# Altium PCB DAQ_REV_B.PcbDoc (part 1 of 2)
Units mil, origin at the board's own origin, x right, y up, seen from the top; angles counter-clockwise.
Board outline 2228.79 x 3254.41 mil, 2 copper layers (Top Layer, Bottom Layer), stack 63.824 mil thick; 159 components, 100 nets, 487 pads, 285 vias.
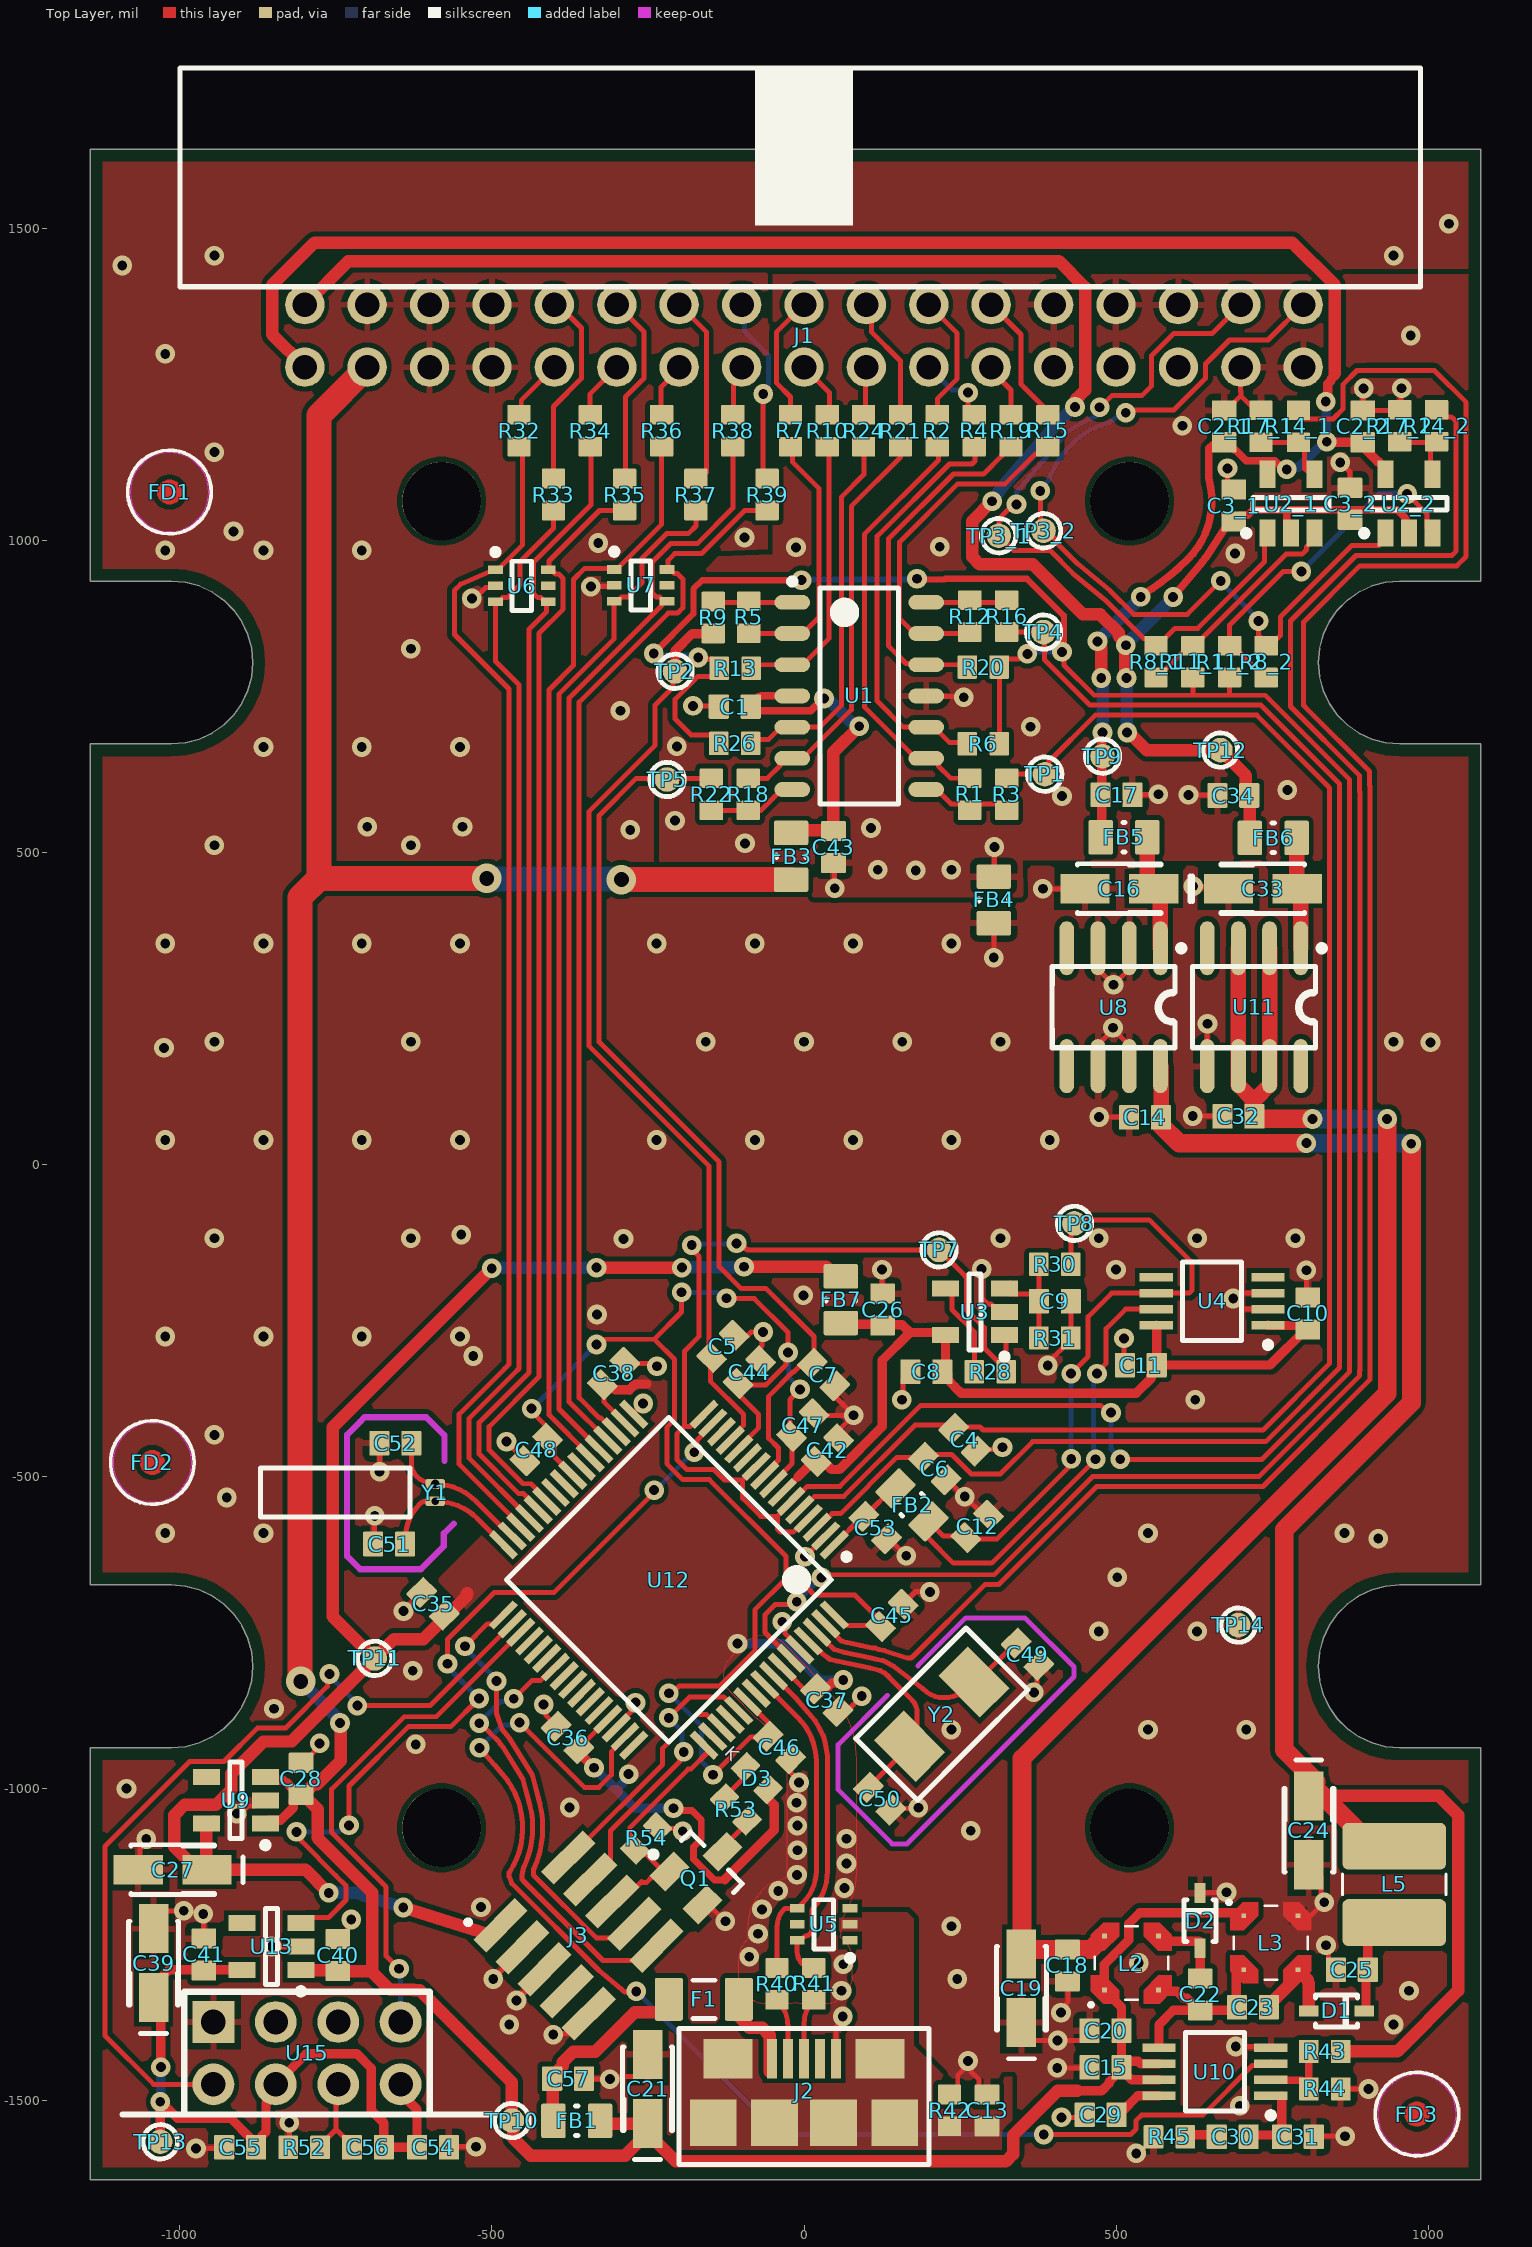
[diagram p0: Top Layer view]
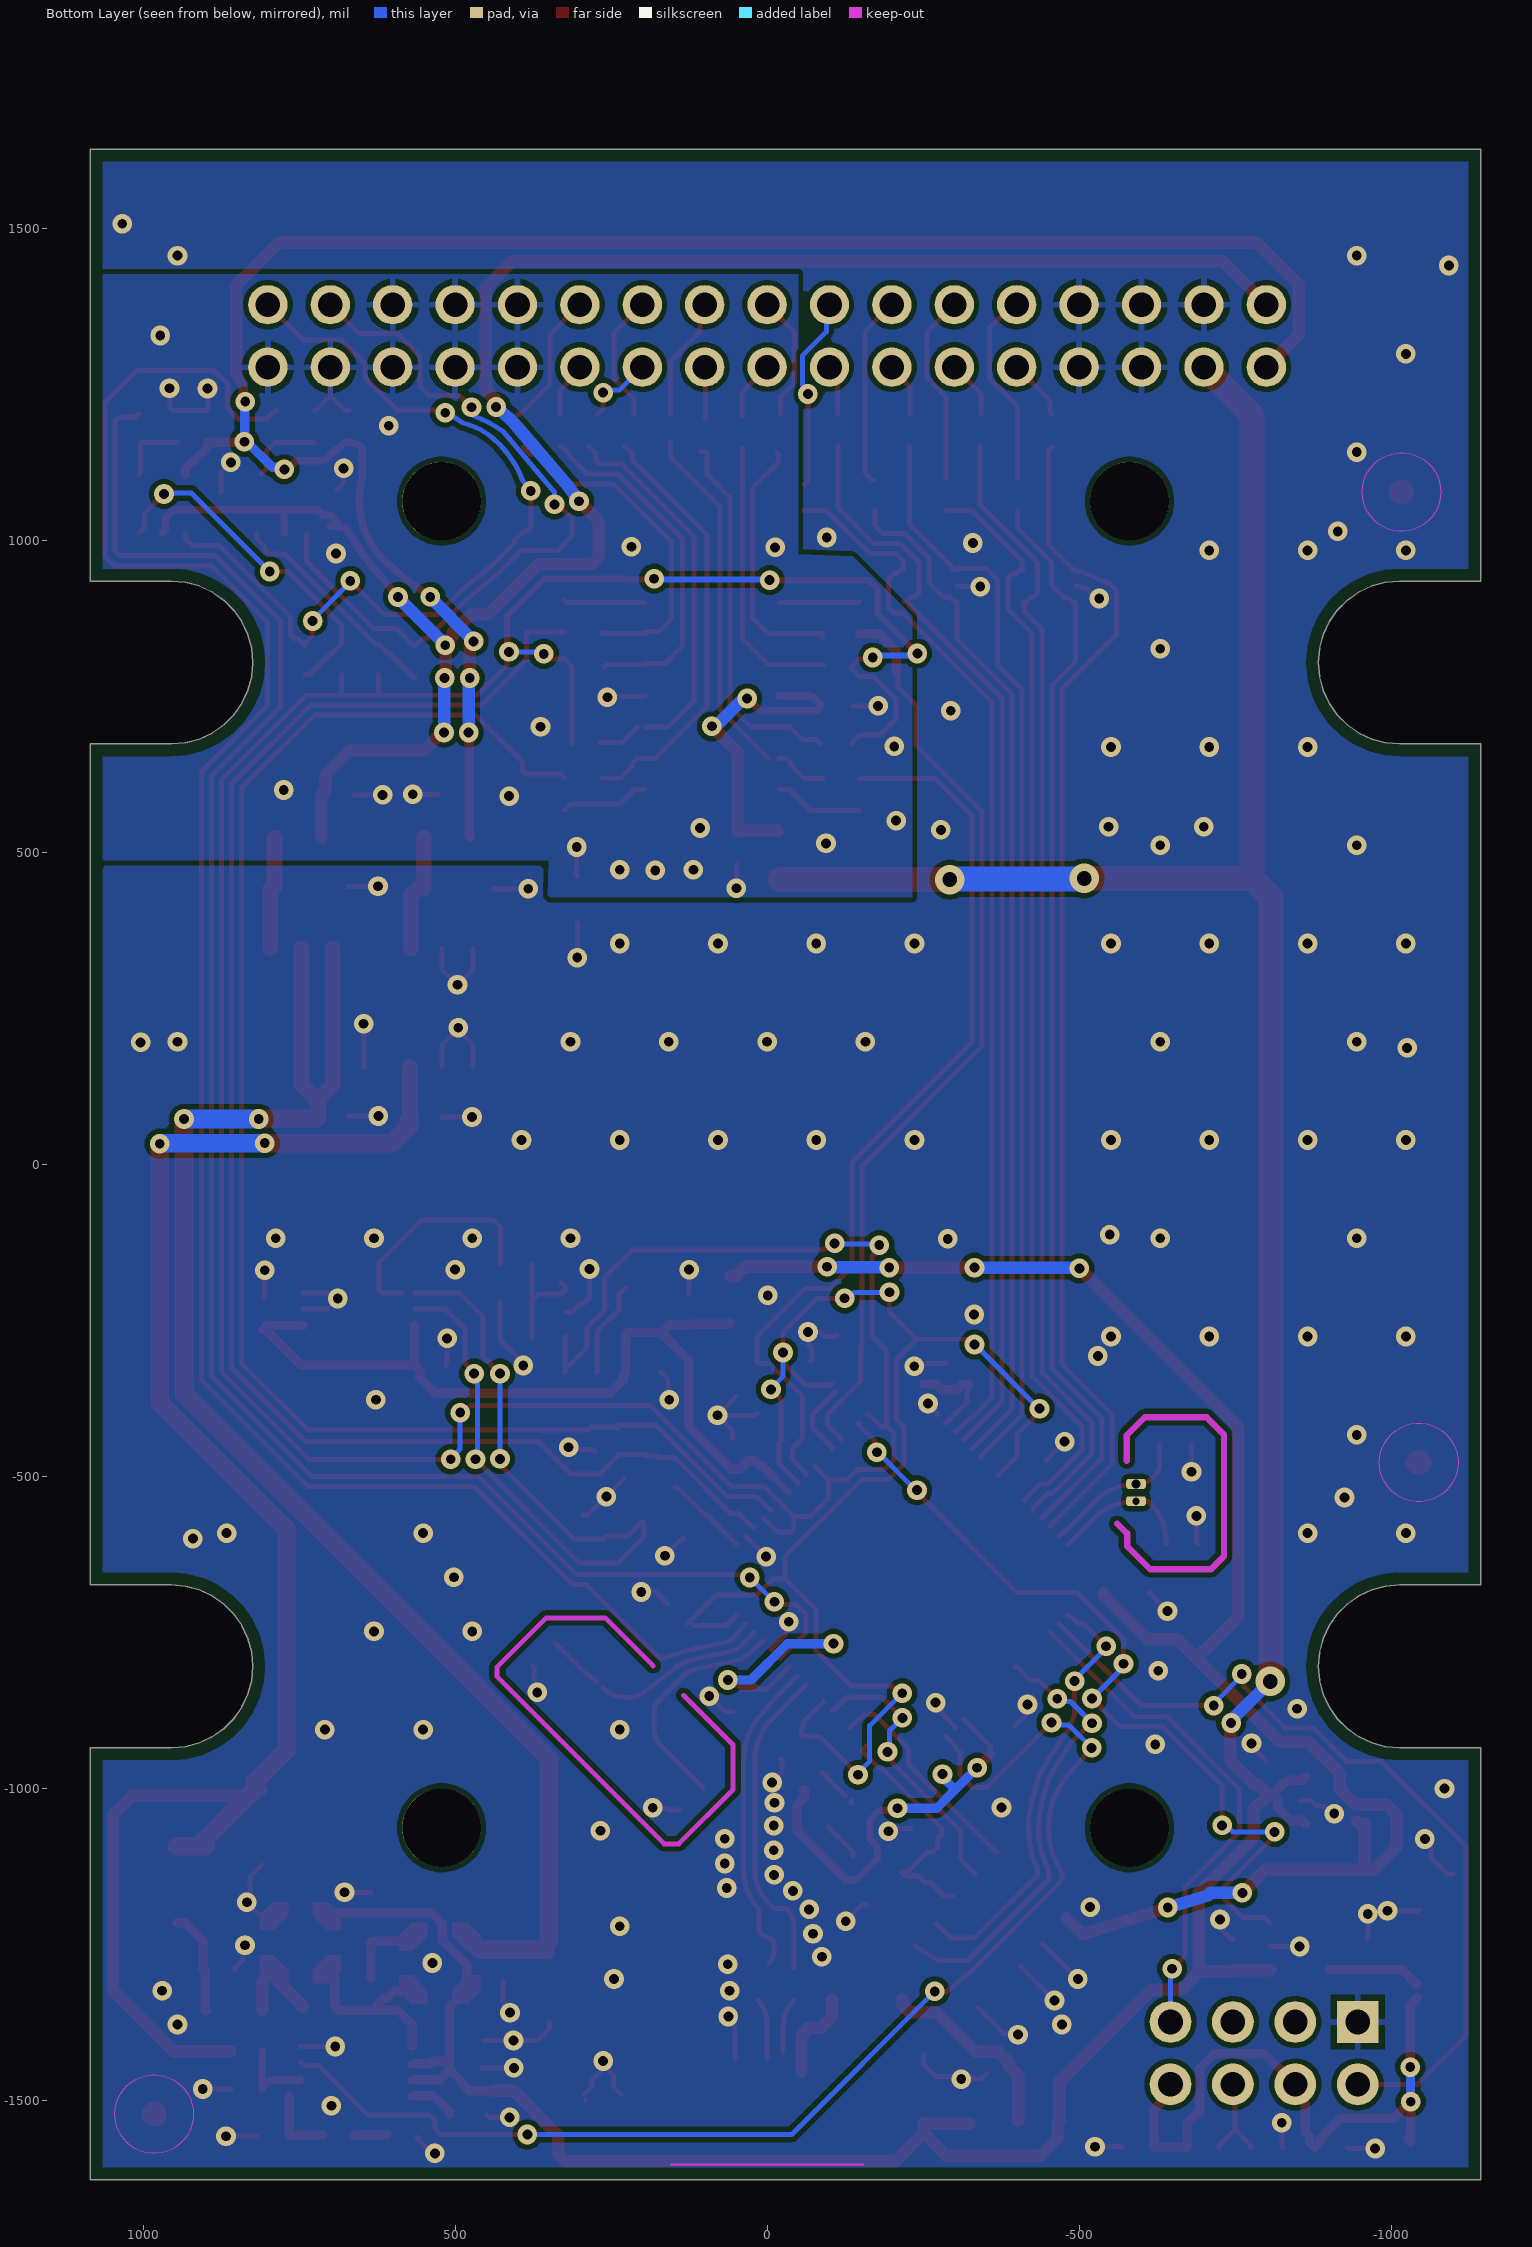
[diagram p1: Bottom Layer view, seen from below]

## Layer stack, top to bottom
Top Solder: solder mask 0.4, Solder Resist, Dk 3.5
Top Layer: signal copper 1.4
Dielectric 1: dielectric 61.0236, FR-4, Dk 4.8
Bottom Layer: signal copper 1.4
Bottom Solder: solder mask 0.4, Solder Resist, Dk 3.5

## Board outline
1084.83,1627.44 -1143.96,1627.44 -1143.96,935.16 -1013.82,935.16 -991.15,933.18 -969.17,927.29 -948.54,917.67 -929.9,904.62 -913.81,888.52 -900.76,869.88 -891.14,849.26 -885.25,827.28 -883.26,804.61 -885.25,781.93 -891.14,759.95 -900.76,739.33 -913.81,720.69 -929.9,704.59 -948.54,691.54 -969.17,681.92 -991.15,676.03 -1013.82,674.05 -1143.96,674.05 -1143.96,-673.58 -1013.82,-673.58 -991.15,-675.56 -969.17,-681.45 -948.54,-691.07 -929.9,-704.12 -913.81,-720.21 -900.76,-738.86 -891.14,-759.48 -885.25,-781.46 -883.26,-804.13 -885.25,-826.8 -891.14,-848.79 -900.76,-869.41 -913.81,-888.05 -929.9,-904.14 -948.54,-917.2 -969.17,-926.81 -991.15,-932.7 -1013.82,-934.69 -1143.96,-934.69 -1143.96,-1626.97 1084.83,-1626.97 1084.83,-934.69 954.68,-934.69 932.01,-932.7 910.03,-926.81 889.41,-917.2 870.77,-904.14 854.67,-888.05 841.62,-869.41 832,-848.79 826.11,-826.8 824.13,-804.13 826.11,-781.46 832,-759.48 841.62,-738.86 854.67,-720.21 870.77,-704.12 889.41,-691.07 910.03,-681.45 932.01,-675.56 954.68,-673.58 1084.83,-673.58 1084.83,674.05 954.68,674.05 932.01,676.03 910.03,681.92 889.41,691.54 870.77,704.59 854.67,720.69 841.62,739.33 832,759.95 826.11,781.93 824.13,804.61 826.11,827.28 832,849.26 841.62,869.88 854.67,888.52 870.77,904.62 889.41,917.67 910.03,927.29 932.01,933.18 954.68,935.16 1084.83,935.16

## Design rules (kind name [scope] priority, off if disabled: settings)
BoardOutlineClearance [All] p1: gap=19.68 ignorepadtopadclearanceinfootprint=FALSE
Clearance [All] p1: gap=8 ignorepadtopadclearanceinfootprint=TRUE
DiffPairsRouting [All] p1: maxlimit=10 minlimit=10 mostfreqgap=10 toplayer_minwidth=8 toplayer_maxwidth=15 toplayer_prefwidth=8 bottomlayer_minwidth=8 bottomlayer_maxwidth=15 bottomlayer_prefwidth=8 maxuncoupledlength=500
FanoutControl Fanout_Default [All] p1: bgadir=Out bgaviamode=Centered fanoutstyle=Auto fanoutdirection=Alternating viagrid=1 // Fanout_Default (Default Rule)
FanoutControl Fanout_Small [(CompPinCount < 5)] p2: bgadir=Out bgaviamode=Centered fanoutstyle=Auto fanoutdirection=OutThenIn viagrid=1 // Fanout_Small (Default Rule)
FanoutControl Fanout_LCC [IsLCC] p4: bgadir=Out bgaviamode=Centered fanoutstyle=Auto fanoutdirection=Alternating viagrid=1 // Fanout_LCC (Default Rule)
FanoutControl Fanout_BGA [IsBGA] p5: bgadir=Out bgaviamode=Centered fanoutstyle=Auto fanoutdirection=Alternating viagrid=1 // Fanout_BGA (Default Rule)
PolygonConnect PolygonConnect_1 [InNet('SHLD') vs InNet('SHLD')] p1: connectstyle=Direct reliefconductorwidth=10 reliefentries=4 polygonreliefangle="90 Angle" airgapwidth=10
PolygonConnect [All] p2: thpad.connectstyle=Relief thpad.reliefconductorwidth=10 thpad.reliefentries=4 thpad.polygonreliefangle="90 Angle" thpad.airgapwidth=10 smdpad.connectstyle=Relief smdpad.reliefconductorwidth=10 smdpad.reliefentries=4 smdpad.polygonreliefangle="90 Angle" smdpad.airgapwidth=10 via.connectstyle=Direct via.reliefconductorwidth=10 via.reliefentries=4 via.polygonreliefangle="90 Angle" via.airgapwidth=10
RoutingVias [All] p1: holewidth=15.75 width=31.5 viastyle="Through Hole" minholewidth=11.81 minwidth=27.56 maxholewidth=31.5 maxwidth=47.24
SolderMaskExpansion [All] p1: expansion=4 istentingtop=FALSE
Width [All] p1: maxlimit=100 minlimit=8 preferedwidth=10
25 further rules are at their usual default settings.

## Classes and differential pairs
channel class Output_amplifier: U_OUT_AMP1 U_OUT_AMP2
net class PIO[0..7]: PIO0 PIO1 PIO2 PIO3 PIO4 PIO5 PIO6 PIO7
net class ANALOG: OUT1_P OUT2_P OUT3_P OUT4_P VREF/2
component class U_VREF: C8 C9 C10 C11 C12 R28 R30 R31 TP7 TP8 U3 U4
component class U_USB: C13 C21 C57 F1 FB1 J2 R40 R41 R42 TP10 U5
component class U_uC: C35 C36 C37 C38 C42 C43 C44 C45 C46 C47 C48 C49 C50 C51 C52 C53 FB2 FB3 FB4 J3 U12 Y1 Y2
component class U_PS: C15 C18 C19 C20 C22 C23 C24 C25 C26 C27 C28 C29 C30 C31 C39 C40 C41 D1 D2 FB7 L2 L3 R43 R44 R45 TP11 TP13 U9 U10 U13
component class U_OUT_AMP2: C2_2 C3_2 R8_2 R11_2 R14_2 R17_2 TP3_2 U2_2
component class U_OUT_AMP1: C2_1 C3_1 R8_1 R11_1 R14_1 R17_1 TP3_1 U2_1
component class U_INTFC: C54 C55 C56 D3 Q1 R52 R53 R54 U15
component class U_IN_AMP: C1 C4 C5 C6 C7 R1 R2 R3 R4 R5 R6 R7 R9 R10 R12 R13 R15 R16 R18 R19 R20 R21 R22 R24 R26 TP1 TP2 TP4 TP5 U1
component class U_DAQ_IO: J1 R32 R33 R34 R35 R36 R37 R38 R39 U6 U7
component class DAQ_REV_B: FD1 FD2 FD3
differential pair USB: +USB_P -USB_N
differential pair IN4: +IN4_P -IN4_N
differential pair IN3: +IN3_P -IN3_N
differential pair IN2: +IN2_P -IN2_N
differential pair IN1: +IN1_P -IN1_N

## Components (designator, comment, footprint, x,y, rotation, side; value= is the part's Value field where it differs from the comment)
C1 "comment" C_0603 -111.01,734.04 r0 top
C2_1 "100n" C_0603 673.23,1183.07 r90 top (schematic designator C2)
C2_2 "100n" C_0603 895.67,1183.07 r90 top (schematic designator C2)
C3_1 "100n" C_0603 688.98,1056.1 r90 top (schematic designator C3)
C3_2 "100n" C_0603 875,1059.06 r90 top (schematic designator C3)
C4 "comment" C_0603 257.87,-440.94 r315 top
C5 "comment" C_0603 -129.92,-291.34 r45 top
C6 "comment" C_0603 209.65,-487.2 r315 top
C7 "comment" C_0603 31.5,-336.61 r315 top
C8 "comment" C_0603 196.11,-332.02 r0 top
C9 "comment" C_0603 402,-218.88 r0 top
C10 "comment" C_0603 807.51,-238.57 r90 top
C11 "comment" C_0603 539.79,-321.25 r180 top
C12 "comment" C_0603 277.56,-579.72 r45 top
C13 "comment" C_0603 293.31,-1515.75 r270 top
C14 "comment" C_0603 546.26,75.71 r180 top
C15 "comment" C_0603 483.27,-1446.85 r0 top
C16 "comment" "Tantalum Case A" 505.39,442.17 r180 top
C17 "comment" C_0603 500.98,592.44 r180 top
C18 "comment" C_0603 422.24,-1283.39 r270 top
C19 "comment" "Tantalum Case A" 348.43,-1319.88 r90 top
C20 "comment" C_0603 483.27,-1387.8 r180 top
C21 "comment" "Tantalum Case A" -250.63,-1481.28 r90 top
C22 "comment" C_0603 634.84,-1329.72 r90 top
C23 "comment" C_0603 719.49,-1350.39 r0 top
C24 "comment" "Tantalum Case A" 809.06,-1066.93 r270 top
C25 "comment" C_0603 877.95,-1290.35 r180 top
C26 "comment" C_0603 125.98,-232.28 r90 top
C27 "comment" "Tantalum Case A" -1011.81,-1129.92 r180 top
C28 "comment" C_0603 -806.1,-984.25 r90 top
C29 "comment" C_0603 475.39,-1522.64 r180 top
C30 "comment" C_0603 687.01,-1558.07 r180 top
C31 "comment" C_0603 791.34,-1558.07 r0 top
C32 "comment" C_0603 696.24,77.31 r180 top
C33 "comment" "Tantalum Case A" 735.39,442.17 r0 top
C34 "comment" C_0603 687.99,591.46 r0 top
C35 "comment" C_0603 -594.49,-703.74 r135 top
C36 "comment" C_0603 -378.94,-918.31 r135 top
C37 "comment" C_0603 36.42,-858.27 r315 top
C38 "comment" C_0603 -305.12,-334.65 r45 top
C39 "comment" "Tantalum Case A" -1042.32,-1279.53 r90 top
C40 "comment" C_0603 -747.05,-1266.73 r90 top
C41 "comment" C_0603 -961.61,-1265.75 r90 top
C42 "comment" C_0603 37.4,-457.68 r45 top
C43 "comment" C_0603 47.24,508.86 r270 top
C44 "comment" C_0603 -87.6,-332.68 r45 top
C45 "comment" C_0603 140.75,-722.44 r45 top
C46 "comment" C_0603 -39.37,-934.06 r315 top
C47 "comment" C_0603 -1.97,-417.32 r45 top
C48 "comment" C_0603 -429.13,-456.69 r225 top
C49 "comment" C_0603 358.15,-784.77 r315 top
C50 "comment" C_0603 121.12,-1016.24 r315 top
C51 "comment" C_0603 -664.88,-608.01 r180 top
C52 "comment" C_0603 -654.81,-446.55 r180 top
C53 "comment" C_0603 114.17,-581.69 r315 top
C54 "100n" C_0603 -594.49,-1574.8 r180 top
C55 "2u2" C_0603 -903.54,-1574.8 r0 top
C56 "1u" C_0603 -698.82,-1574.8 r0 top
C57 "comment" C_0603 -377.95,-1464.65 r0 top
D1 "PMEG2020" SOD323 853.35,-1356.3 r0 top
D2 "PMEG2020" SOD323 634.84,-1211.61 r90 top
D3 "LED Green" LED_0603 -75.79,-983.27 r315 top
F1 "250mA" "PPTCF 1206" -160.43,-1337.6 r180 top
FB1 "120Ω @ 100MHz" SMD_0805 -364.17,-1532.48 r0 top
FB2 "120Ω @ 100MHz" SMD_0805 173.23,-545.28 r315 top
FB3 "120Ω @ 100MHz" SMD_0805 -20.67,494.1 r90 top
FB4 "120Ω @ 100MHz" SMD_0805 304.13,424.21 r90 top
FB5 "120Ω @ 100MHz" SMD_0805 512.8,524.53 r180 top
FB6 "120Ω @ 100MHz" SMD_0805 751.97,523.54 r180 top
FB7 "120Ω @ 100MHz" SMD_0805 59.06,-216.54 r270 top
FD1 "Fiducial 1mm" FID1 -1016.73,1077.76 r180 top
FD2 "Fiducial 1mm" FID1 -1044.29,-477.36 r0 top
FD3 "Fiducial 1mm" FID1 982.28,-1521.65 r0 top
J1 "2X17" IDC34R 0,1327.95 r0 top locked
J2 "micro USB B" MICRO_USB_A 0,-1484.25 r0 top
J3 "M50-3600542" HEADER_2X05_1.27mm -361.45,-1235.31 r315 top
L2 "LPD3015-153" LPD3015 524.61,-1279.53 r90 top
L3 "LPD3015-153" LPD3015 748.03,-1247.05 r0 top
L5 "10u" IND_SMD_4X4mm 945.87,-1153.54 r90 top
Q1 "2N7002" SOT23-3 -160.03,-1130.25 r315 top
R1 "comment" R_0603 265.68,593.54 r270 top
R2 "comment" R_0603 213.58,1176.18 r270 top
R3 "comment" R_0603 324.74,593.54 r90 top
R4 "comment" R_0603 272.64,1176.18 r270 top
R5 "comment" R_0603 -88.65,877.01 r90 top
R6 "comment" R_0603 287.34,674.25 r180 top
R7 "comment" R_0603 -21.65,1176.18 r270 top
R8_1 "comment" R_0603 563.98,806.1 r90 top (schematic designator R8)
R8_2 "comment" R_0603 740.65,806.1 r90 top (schematic designator R8)
R9 "comment" R_0603 -145.46,876.75 r270 top
R10 "comment" R_0603 37.4,1176.18 r270 top
R11_1 "comment" R_0603 623.03,806.1 r90 top (schematic designator R11)
R11_2 "comment" R_0603 682.09,806.1 r90 top (schematic designator R11)
R12 "comment" R_0603 265.68,878.97 r90 top
R13 "comment" R_0603 -110.3,795.31 r0 top
R14_1 "comment" R_0603 792.32,1183.07 r270 top (schematic designator R14)
R14_2 "comment" R_0603 1013.78,1184.06 r270 top (schematic designator R14)
R15 "comment" R_0603 390.75,1176.18 r270 top
R16 "comment" R_0603 324.74,878.97 r270 top
R17_1 "comment" R_0603 732.28,1183.07 r270 top (schematic designator R17)
R17_2 "comment" R_0603 954.72,1184.06 r270 top (schematic designator R17)
R18 "comment" R_0603 -89.36,593.29 r270 top
R19 "comment" R_0603 331.69,1176.18 r270 top
R20 "comment" R_0603 287.34,797.28 r180 top
R21 "comment" R_0603 154.53,1176.18 r270 top
R22 "comment" R_0603 -148.42,593.29 r90 top
R24 "comment" R_0603 95.47,1176.18 r270 top
R26 "comment" R_0603 -111.01,674.98 r0 top
R28 "comment" R_0603 298.48,-332.02 r0 top
R30 "comment" R_0603 402,-159.83 r0 top
R31 "comment" R_0603 402,-277.94 r180 top
R32 "comment" R_0603 -456.69,1176.18 r90 top
R33 "comment" R_0603 -401.51,1073.82 r270 top
R34 "comment" R_0603 -342.44,1176.18 r90 top
R35 "comment" R_0603 -287.36,1073.82 r270 top
R36 "comment" R_0603 -228.19,1176.18 r90 top
R37 "comment" R_0603 -173.21,1073.82 r270 top
R38 "comment" R_0603 -113.94,1176.18 r90 top
R39 "comment" R_0603 -59.06,1073.82 r270 top
R40 "comment" R_0603 -43.31,-1312.99 r90 top
R41 "comment" R_0603 15.75,-1312.99 r90 top
R42 "comment" R_0603 233.27,-1515.75 r270 top
R43 "comment" R_0603 834.65,-1421.26 r180 top
R44 "comment" R_0603 834.65,-1481.3 r180 top
R45 "comment" R_0603 585.63,-1558.07 r0 top
R52 "comment" R_0603 -801.18,-1574.8 r0 top
R53 "comment" R_0603 -109.25,-1033.46 r135 top
R54 "comment" R_0603 -252.95,-1079.72 r225 top
TP1 "testpoint" TP1_FULL 385.76,625.69 r0 top
TP2 "testpoint" TP1_FULL -206.76,790.39 r90 top
TP3_1 "testpoint" TP1_FULL 312.01,1007.87 r90 top (schematic designator TP3)
TP3_2 "testpoint" TP1_FULL 383.86,1015.75 r180 top (schematic designator TP3)
TP4 "testpoint" TP1_FULL 383.79,853.38 r90 top
TP5 "testpoint" TP1_FULL -219.49,617.13 r90 top
TP7 "testpoint" TP1_FULL 216.36,-136.74 r90 top
TP8 "testpoint" TP1_FULL 433.28,-94.28 r90 top
TP9 "testpoint" TP1_FULL 478.35,654.45 r0 top
TP10 "testpoint" TP1_FULL -468.07,-1531.93 r90 top
TP11 "testpoint" TP1_FULL -687.93,-791.41 r270 top
TP12 "testpoint" TP1_FULL 667.32,664.29 r0 top
TP13 "testpoint" TP1_FULL -1031.5,-1565.95 r270 top
TP14 "testpoint" TP1_FULL 696.02,-737.97 r90 top
U1 "OPA4348" SOIC14 88.52,751.02 r0 top
U2_1 "ADA4000-1" SOT23-5 780.51,1059.06 r90 top (schematic designator U2)
U2_2 "ADA4000-1" SOT23-5 969.49,1059.06 r90 top (schematic designator U2)
U3 "TLV2471" SOT23-5 274.01,-235.96 r180 top
U4 "ADR3525WA" MSOP8 653.97,-218.88 r180 top
U5 "PUSB2X4Y" SOT363 31.5,-1217.52 r180 top
U6 "PUSB2X4Y" SOT363 -452.18,927.51 r0 top
U7 "PUSB2X4Y" SOT363 -261.81,928.15 r0 top
U8 "MC78L12ACDG" SOIC8 496.14,252.21 r270 top
U9 "TPS70933" SOT23-5 -910.43,-1018.7 r180 top
U10 "ADP1613" MSOP8 658.46,-1453.74 r180 top
U11 "MC79L12ACDG" SOIC8 721.14,252.21 r270 top
U12 "ATSAM3S4B" LQFP64 -216.54,-665.35 r225 top
U13 "TPS73633" SOT23-5 -853.35,-1252.95 r180 top
U15 "ESP-01" ESP-01 -796.46,-1424.02 r90 top locked
Y1 "32.768khz" 2X6_FLAT -591.18,-525.59 r180 top
Y2 "16MHz" 5X3.2 220.74,-880.62 r225 top

## Footprints (in the part's own frame and the unit in brackets; to place one, negate y for a bottom-side part, rotate by r counter-clockwise, add the part's x,y. Pads: shape width x height; smd on the part's side, far side on the other; paste and mask are expansions set on the pad)
2X6_FLAT [mm]
  rrect50% 0.8x0.4 hole 0.35: 1(0,-0.35)
  rrect50% 0.8x0.4 hole 0.3: 2(0,0.35)
  silkscreen extent 1.02,-1 7.11,1, body extent -0.14,-1 7,1, height 3
5X3.2 [mm] "TXC 7A series crysal oscillator footprint"
  rect 1.7x2.4 smd: 1(-1.85,0) 2(1.85,0)
  silkscreen extent -3.18,-1.78 3.18,1.78, body extent -2.5,-1.6 2.5,1.6, height 1.26
C_0603 [mm] "Chip Capacitor, 2-Leads, Body 1.57x0.85mm, IPC Medium Density"
  rrect10% 0.82x1 smd: 1(-0.65,0) 2(0.65,0)
  body extent -0.82,-0.48 0.82,0.48, height 0.95
ESP-01 [mm]
  rect 1.7x1.7 hole 1: 1(1.27,3.81)
  round 1.7 hole 1: 2(-1.27,3.81) 3(1.27,1.27) 4(-1.27,1.27) 5(1.27,-1.27) 6(-1.27,-1.27) 7(1.27,-3.81) 8(-1.27,-3.81)
  silkscreen extent -2.5,-7.5 2.5,7.5, body extent -2.8,-7.25 22,7.25, height 13.88
FID1 [mil]
  Top Layer region: 0,-19.68 -3.92,-19.68 -11.15,-16.69 -16.69,-11.15 -19.68,-3.92 -19.68,0 -19.68,3.92 -16.69,11.15 -11.15,16.69 -3.92,19.68 0,19.69 3.92,19.69 11.15,16.69 16.69,11.15 19.68,3.92 19.68,0 19.68,-3.92 16.69,-11.15 11.15,-16.69 3.92,-19.68 0,-19.68
  Keep-Out Layer circle w0.39: c0,0 r62.99
  silkscreen extent -67,-67 67,67
HEADER_2X05_1.27mm [mm]
  rect 0.74x2.4 smd: 1(-2.54,-1.95) 2(-2.54,1.95) 3(-1.27,-1.95) 4(-1.27,1.95) 5(0,-1.95) 6(0,1.95) 7(1.27,-1.95) 8(1.27,1.95) 9(2.54,-1.95) 10(2.54,1.95)
  silkscreen extent -3.66,-2.89 -3.46,-2.69, body extent -3.18,-2.75 3.17,2.75, height 4.51
IDC34R [mm]
  round 1.6 hole 1: 1(-20.32,-1.27) 2(-20.32,1.27) 3(-17.78,-1.27) 4(-17.78,1.27) 5(-15.24,-1.27) 6(-15.24,1.27) 7(-12.7,-1.27) 8(-12.7,1.27) 9(-10.16,-1.27) 10(-10.16,1.27) 11(-7.62,-1.27) 12(-7.62,1.27) 13(-5.08,-1.27) 14(-5.08,1.27) 15(-2.54,-1.27) 16(-2.54,1.27) 17(0,-1.27) 18(0,1.27) 19(2.54,-1.27) 20(2.54,1.27) 21(5.08,-1.27) 22(5.08,1.27) 23(7.62,-1.27) 24(7.62,1.27) 25(10.16,-1.27) 26(10.16,1.27) 27(12.7,-1.27) 28(12.7,1.27) 29(15.24,-1.27) 30(15.24,1.27) 31(17.78,-1.27) 32(17.78,1.27) 33(20.32,-1.27) 34(20.32,1.27)
  silkscreen extent -25.4,2 25.1,10.9, body extent -25.71,-1.56 25.71,12, height 8.85
IND_SMD_4X4mm [mm]
  rrect26% 1.91x4.22 smd: 1(-1.555,0) 2(1.555,0)
  silkscreen extent -0.42,-2.1 0.42,2.1, body extent -2,-2 2,2, height 2.15
LED_0603 [mm] "SMD LED, 2-Leads, Body 1.57x0.85mm, IPC Medium Density"
  rrect10% 0.8x0.95 smd: 1(-0.65,0) 2(0.65,0)
  body extent -0.8,-0.4 0.8,0.4, height 0.7
LPD3015 [mm]
  rect 0.2x0.2 smd: 1(-1.1,1.1) 2(-1.1,-1.1) 3(1.1,-1.1) 4(1.1,1.1)
  Top Layer region: -1.65,0.5 -1.1,0.5 -0.5,1.1 -0.5,1.65 -1.15,1.65 -1.65,1.15
  Top Layer region: -1.65,-0.5 -1.1,-0.5 -0.5,-1.1 -0.5,-1.65 -1.15,-1.65 -1.65,-1.15
  Top Layer region: 1.65,-0.5 1.1,-0.5 0.5,-1.1 0.5,-1.65 1.15,-1.65 1.65,-1.15
  Top Layer region: 1.65,0.5 1.1,0.5 0.5,1.1 0.5,1.65 1.15,1.65 1.65,1.15
  silkscreen extent -1.75,-1.5 1.5,1.69, body extent -1.55,-1.54 1.53,1.54, height 1.5
LQFP64 [mm]
  rect 1.4x0.3 smd: 1(-5.775,3.75) 2(-5.775,3.25) 3(-5.775,2.75) 4(-5.775,2.25) 5(-5.775,1.75) 6(-5.775,1.25) 7(-5.775,0.75) 8(-5.775,0.25) 9(-5.775,-0.25) 10(-5.775,-0.75) 11(-5.775,-1.25) 12(-5.775,-1.75) 13(-5.775,-2.25) 14(-5.775,-2.75) 15(-5.775,-3.25) 16(-5.775,-3.75) 33(5.775,-3.75) 34(5.775,-3.25) 35(5.775,-2.75) 36(5.775,-2.25) 37(5.775,-1.75) 38(5.775,-1.25) 39(5.775,-0.75) 40(5.775,-0.25) 41(5.775,0.25) 42(5.775,0.75) 43(5.775,1.25) 44(5.775,1.75) 45(5.775,2.25) 46(5.775,2.75) 47(5.775,3.25) 48(5.775,3.75)
  rect 0.3x1.4 smd: 17(-3.75,-5.775) 18(-3.25,-5.775) 19(-2.75,-5.775) 20(-2.25,-5.775) 21(-1.75,-5.775) 22(-1.25,-5.775) 23(-0.75,-5.775) 24(-0.25,-5.775) 25(0.25,-5.775) 26(0.75,-5.775) 27(1.25,-5.775) 28(1.75,-5.775) 29(2.25,-5.775) 30(2.75,-5.775) 31(3.25,-5.775) 32(3.75,-5.775) 49(3.75,5.775) 50(3.25,5.775) 51(2.75,5.775) 52(2.25,5.775) 53(1.75,5.775) 54(1.25,5.775) 55(0.75,5.775) 56(0.25,5.775) 57(-0.25,5.775) 58(-0.75,5.775) 59(-1.25,5.775) 60(-1.75,5.775) 61(-2.25,5.775) 62(-2.75,5.775) 63(-3.25,5.775) 64(-3.75,5.775)
  silkscreen extent -5.9,-4.68 4.68,4.67, body extent -6,-6 6,6, height 1.6
MICRO_USB_A [mm]
  rect 0.4x1.6 smd: 1(-1.3,1.3) 2(-0.65,1.3) 3(0,1.3) 4(0.65,1.3) 5(1.3,1.3)
  rect 2x1.6 smd: 6(-3.1,1.3) 6(3.1,1.3)
  rect 1.9x1.9 smd: 7(-3.7,-1.3) 7(-1.2,-1.3) 7(1.2,-1.3) 7(3.7,-1.3)
  Keep-Out Layer lines w0.1: -3.9,-3 3.9,-3
  silkscreen extent -5.08,-3 5.08,2.54, body extent -3.96,-4.06 3.96,1.6, height 2.71
MSOP8 [mm]
  rect 1.35x0.35 smd: 1(-2.275,0.975) 2(-2.275,0.325) 3(-2.275,-0.325) 4(-2.275,-0.975) 5(2.275,-0.975) 6(2.275,-0.325) 7(2.275,0.325) 8(2.275,0.975)
  silkscreen extent -2.4,-1.6 1.2,1.9, body extent -2.58,-1.6 2.58,1.6, height 1.01
"PPTCF 1206" [mm] "PPTC fuse 2-Leads, Body 3.15x1.60mm, IPC Medium Density"
  rrect15% 1.15x1.75 smd: 1(-1.425,0) 2(1.425,0)
  silkscreen extent -0.45,-0.77 0.45,0.78, body extent -1.6,-0.82 1.6,0.83, height 0.59
R_0603 [mm] "Chip Resistor, 2-Leads, Body 1.57x0.85mm, IPC Medium Density"
  rrect10% 0.8x0.95 smd: 1(-0.65,0) 2(0.65,0)
  body extent -0.82,-0.48 0.82,0.48, height 0.5
SMD_0805 [mm] "Chip 2-Leads, Body 2.05x1.25mm, IPC Medium Density"
  rrect15% 1x1.4 smd: 1(-0.95,0) 2(0.95,0)
  silkscreen extent -0.05,-0.6 0.05,0.6, body extent -1.1,-0.7 1.1,0.7, height 0.8
SOD323 [mm]
  rect 0.8x0.45 smd: 1(-1.125,0) 2(1.125,0)
  silkscreen extent -0.85,-0.65 0.85,0.65, body extent -0.85,-0.63 0.85,0.63, height 0.9
SOIC8 [mm]
  oval 2.2x0.6 smd: 1(-2.4,1.905) 2(-2.4,0.635) 3(-2.4,-0.635) 4(-2.4,-1.905) 5(2.4,-1.905) 6(2.4,-0.635) 7(2.4,0.635) 8(2.4,1.905)
  silkscreen extent -2.52,-2.5 1.65,2.88, body extent -2.89,-2.41 2.89,2.49, height 1.45
SOIC14 [mm]
  oval 1.45x0.6 smd: 1(-2.725,3.81) 2(-2.725,2.54) 3(-2.725,1.27) 4(-2.725,0) 5(-2.725,-1.27) 6(-2.725,-2.54) 7(-2.725,-3.81) 8(2.725,-3.81) 9(2.725,-2.54) 10(2.725,-1.27) 11(2.725,0) 12(2.725,1.27) 13(2.725,2.54) 14(2.725,3.81)
  silkscreen extent -2.85,-4.4 1.6,4.78, body extent -2.77,-4.26 3.03,4.26, height 1.75
SOT23-3 [mm]
  rect 0.9x1.4 smd: 1(-0.95,-1.05) 2(0.95,-1.05) 3(0,1.05)
  silkscreen extent -2.03,-1.14 1.5,0.7, body extent -1.45,-1.4 1.45,1.4, height 1.3
SOT23-5 [mm]
  rect 1.1x0.65 smd: 1(-1.2,0.95) 2(-1.2,0) 3(-1.2,-0.95) 4(1.2,-0.95) 5(1.2,0.95)
  silkscreen extent -1.32,-1.55 0.25,1.95, body extent -1.4,-1.45 1.4,1.45, height 1.45
SOT363 [mm]
  rect 0.6x0.35 smd: 1(-1.075,0.65) 2(-1.075,0) 3(-1.075,-0.65) 4(1.075,-0.65) 5(1.075,0) 6(1.075,0.65)
  silkscreen extent -1.2,-1 0.4,1.5, body extent -1.13,-1 1.13,1, height 1.05
"Tantalum Case A" [mm]
  rect 2x1.2 smd: 1(-1.4,0) 2(1.4,0)
  silkscreen extent -2.87,-1.02 1.7,1.02, body extent -1.66,-0.86 1.74,0.94, height 1.8
TP1_FULL [mm]
  round 1 smd: 1(0,0)
  silkscreen extent -0.7,-0.7 0.7,0.7

## Part data
C1 C2_1 C2_2 C3_1 C3_2 C4 C5 C6 C7 C8 C9 C10 C11 C12 C13 C14 C15 C17 C18 C20 C22 C23 C25 C26 C28 C29 C30 C31 C32 C34 C35 C36 C37 C38 C40 C41 C42 C43 C44 C45 C46 C47 C48 C49 C50 C51 C52 C53 C54 C55 C56 C57: library part Capacitor, "Generic capacitor"
C16 C19 C21 C24 C27 C33 C39: library part "Capacitor - polarized", "Generic polarized capacitor"
D1 D2: "Schottky diode, 2A 20V"
D3: "Generic LED Green"
F1: library part 1206L025YR, "Resettable Fuse, PPTC, 1206 (3216 Metric), POLYFUSE 1206L Series, 16 VDC, 250 mA, 500 mA, 0.08 s"
FB1 FB2 FB3 FB4 FB5 FB6 FB7: library part BLM21AG121SN1D, "Ferrite Bead, 0805 [2012 Metric], 120 ohm, 800 mA, BLM21A Series, 0.15 ohm, ± 25%"
FD1 FD2 FD3: library part FIDUCIAL
J1: library part "09 18 534 7323", "Pin Header, Right Angle, Wire-to-Board, 2.54 mm, 2 Rows, 34 Contacts, Through Hole Right Angle"
J2: library part 10104111-0001LF, "USB Connector, Micro USB Type AB, USB 2.0, Receptacle, 5 Ways, Surface Mount, Right Angle"
J3: "Pin Header, Board-to-Board, 1.27 mm, 2 Rows, 10 Contacts, Surface Mount, Archer M50 Series"
L2 L3: "Inductor, Coupled, 15 µH, 20%, 1.42 ohm, 460 mA, 3mm x 3mm x 1.4mm"
L5: library part TYS4012100M-10, "Power Inductor (SMD), 10 µH, 770 mA, Shielded, 800 mA, TYS Series, 4mm x 4mm x 1.2mm"
Q1: "60V 0.3A N-channel MOSFET"
R1 R2 R3 R4 R5 R6 R7 R8_1 R8_2 R9 R10 R11_1 R11_2 R12 R13 R14_1 R14_2 R15 R16 R17_1 R17_2 R18 R19 R20 R21 R22 R24 R26 R28 R30 R31 R32 R33 R34 R35 R36 R37 R38 R39 R40 R41 R42 R43 R44 R45 R52 R53 R54: library part Resistor, "Generic resistor"
TP1 TP2 TP3_1 TP3_2 TP4 TP5 TP7 TP8 TP9 TP10 TP11 TP12 TP13 TP14: library part "Test Point", "testpoint 1.5mm diameter no hole"
U1: "1MHz, 45µA, CMOS, Rail-to-Rail OPERATIONAL AMPLIFIERS Value Line Series"
U2_1 U2_2: "Operational Amplifier, Single, 1 Amplifier, 5 MHz, 20 V/µs, ± 4V to ± 18V, TSOT, 5 Pins"
U3: "FAMILY OF 600μA/Ch 2.8MHz RAIL-TO-RAIL INPUT/OUTPUT / HIGH-DRIVE OPERATIONAL AMPLIFIERS WITH SHUTDOWN"
U4: library part ADR3525W, "Precision Voltage References 2.5V CMOS 8ppm/C"
U5 U6 U7: "ESD protection for high-speed interfaces"
U8: library part 78LXX, "100 mA Positive Voltage Regulator"
U9: library part TPS709XX, "1-µA IQ Voltage Regulators with Enable"
U10: library part ADP161X, "650 kHz /1.3 MHz Step-Up PWM DC-to-DC Switching Converters / REGULATORS  / Synchronous Step-Down DC-DC Converter"
U11: library part 79LXX, "100 mA Negative Voltage Regulator"
U12: library part ATSAM3SXB, "Cortex M3 ARM microcontroller"
U13: library part TPS736XX, "Cap-Free, NMOS, 400-mA Low-Dropout Regulator with Reverse Current Protection"
U15: "WIFI module"
Y1: library part "R26-32.768- 12.5", "Crystal, 32.768 kHz, Cylinder Radial, 6.2mm x 2mm Dia, 12.5 pF, 20 ppm, R26 Series"
Y2: library part 7A-16.000MAAJ-T, "Crystal, 16 MHz, SMD, 5mm x 3.2mm, 30 ppm, 18 pF, 30 ppm, 7A Series"

## Free pads (board coordinates)
  round 125.98 hole 125.98 unplated mask-99999: 1(-580.75,-1062.76) 1(-580.75,1063.23) 1(521.61,-1062.76) 1(521.61,1063.23)

## Via types
v1: diameter 31.5, hole 15.75, Top Layer to Bottom Layer, 242 vias
v2: diameter 31.5, hole 15.75, Top Layer to Bottom Layer, tented both sides, 40 vias
v3: diameter 47.24, hole 23.62, Top Layer to Bottom Layer, 3 vias

## Nets (pads, with @x,y where several pads share a name; then routed paths per layer and width w, separated by ;. In a path a pad name is that pad's centre, name@x,y a point inside that pad or via, vN(x,y) a via of type N, cw(c..) or ccw(c..) an arc to the next point about the centre after c; other vN are vias at no path point)
3V3: C27.1 C35.1 C36.1 C37.1 C38.1 D3.2 FB7.1 J3.1 TP11.1 U9.5 U12.18 U12.45 U12.58 | length 3805.7
  Top Layer w8: C36.1@-357.78,-945.29 -357.78,-932.58 -357.78,-931.87 U12.45@-314.67,-888.76 ; C38.1@-320.71,-355.25 -320.71,-380.23 U12.18@-286.83,-414.11 ; U12.58@-34.89,-805.24 0.6,-840.73 17.77,-840.73 C37.1@18.32,-840.17 C37.1@20.83,-837.67 ; v1@58.29,-830.41 v1(62.79,-825.92)
  Top Layer w10: v1(-209.02,-1031.61) v1@-205.1,-1035.53
  Top Layer w11: v1@-204.92,-1035.34 -179.22,-1035.34 -164.59,-1049.98 -164.59,-1080.6 -177.17,-1093.18 -177.17,-1113.11 -144.25,-1146.03 -143.85,-1146.03 -143.35,-1146.53 -127.68,-1146.53 -126.97,-1145.82
  Top Layer w12: v1@-205.1,-1035.53 v1@-204.92,-1035.34
  Top Layer w15: C36.1@-357.78,-945.29 v1(-336.57,-966.49) ; C38.1@-320.71,-355.25 C38.1@-323.21,-352.74 -310.99,-352.74 -302.71,-361.03 -280.22,-361.03 -270.82,-351.63 -251.5,-351.63 ; -126.97,-1145.82 -47.54,-1066.39 -47.54,-1026.36 -59.28,-1014.62 -59.28,-1002.95 D3.2@-57.69,-1001.36 ; C37.1@20.83,-837.67 38,-837.67 45.25,-830.41 v1@58.29,-830.41
  Top Layer w20: U9.5@-946.02,-1053.31 -948.82,-1056.1 U9.5@-957.68,-1056.1 -957.68,-1128.94 C27.1@-956.69,-1129.92 ; v1(-761.66,-1167.15) -798.89,-1129.92 C27.1@-956.69,-1129.92 ; v2(-642.18,-1190.49) -506.92,-1233.06 J3.1@-479.45,-1207.8 ; -539.37,-687.01 -540.35,-687.99 -540.35,-690.94 -609.83,-760.42 -656.94,-760.42 TP11.1@-687.92,-791.41 ; v1(-500.46,-166.34) -755.22,-421.1 -755.22,-724.11 TP11.1@-687.92,-791.41 ; v1(-332.49,-165.14) v1(-195.76,-165.14) ; v1(-96.15,-163.83) 35.88,-163.83 51.18,-179.13 FB7.1@59.06,-179.13 ; C27.1@-956.69,-1129.92 -972.44,-1129.92 -1008.86,-1093.5 -1008.86,-1042.32 -992.4,-1025.87 -942.34,-1025.87 -917.74,-1001.27 -917.74,-975.94 -866.31,-924.52 -821.04,-924.52 TP11.1@-687.92,-791.41
  Bottom Layer w15: v1(-336.57,-966.49) -299.88,-1003.18 ; v2(-281.07,-976.83) -281.07,-981.29 -299.88,-1000.1 -299.88,-1003.18 ; v1(-209.02,-1031.61) -209.28,-1031.35 -271.71,-1031.35 -299.88,-1003.18 ; v2(-106.49,-767.72) -32.43,-767.72 25.78,-825.92 v1(62.79,-825.92)
  Bottom Layer w20: v1(-761.66,-1167.15) -710.46,-1167.15 -706.58,-1171.03 v2(-642.18,-1190.49) ; v1(-500.46,-166.34) -499.26,-165.14 v1(-332.49,-165.14) ; v1(-195.76,-165.14) -195.11,-164.49 -96.81,-164.49 v1(-96.15,-163.83)
3V3A: C8.2 C10.1 C11.1 C26.1 C42.1 FB7.2 U3.5 U4.1 U4.8 U12.7 | length 1389.3
  Top Layer w10: U12.7@-34.89,-525.46 -9.64,-500.22
  Top Layer w15: -9.64,-500.22 8.67,-481.91 C42.1@12.2,-481.91 ; C42.1@18.32,-474.79 30.49,-474.79 44.27,-488.57 56.7,-488.57 125.57,-419.7 125.57,-313.4 169.83,-269.15 ; FB7.2@59.06,-253.94 61.02,-255.91 C26.1@124.02,-255.91 ; C26.1@125.98,-257.87 127.31,-256.54 157.22,-256.54 169.83,-269.15 ; U4.8@564.4,-257.27 564.78,-257.27 565.39,-257.88 C11.1@565.39,-321.24 ; U4.1@743.53,-257.27 744.14,-257.88 801.23,-257.88 C10.1@807.51,-264.16 803.97,-264.16 746.88,-321.24 C11.1@565.39,-321.24 ; 169.83,-269.15 222.55,-269.15 U3.5@226.76,-273.36 226.76,-332.02 230.35,-335.6 230.35,-344.6 241.64,-355.89 241.64,-356.22 251.64,-366.22 532.4,-366.22 556.74,-341.88 556.74,-329.89 C11.1@565.39,-321.24
3V3W: C39.1 C41.1 C54.2 C55.2 C56.2 TP13.1 U13.5 U15.4 U15.8 | length 1177.6
  Top Layer w15: C39.1@-1042.32,-1334.65 -1030.62,-1346.35 v1(-1030.62,-1446.27) ; C39.1@-1041.34,-1313.98 -1017.72,-1290.35 U13.5@-900.59,-1290.35 ; TP13.1@-1027.56,-1562.01 TP13.1@-1031.5,-1565.95 v1(-1031.5,-1501.76) -1030.57,-1501.76 -1003.99,-1528.35 -918.79,-1528.35 -886.59,-1560.54 -886.59,-1566.16 C55.2@-877.95,-1574.8 -869.31,-1566.16 -869.31,-1557 -862.2,-1549.89 -862.2,-1503.82 -846.46,-1488.07 U15.4@-846.46,-1474.02 -797.49,-1425.05 -716.54,-1425.05 -693.36,-1448.23 -693.36,-1518.04 -691.14,-1518.04 -673.23,-1535.96 C56.2@-673.23,-1574.8 C54.2@-620.08,-1574.8 -620.08,-1514.45 -646.46,-1488.07 U15.8@-646.46,-1474.02
  Bottom Layer w15: v1(-1031.5,-1501.76) -1031.06,-1501.33 -1031.06,-1446.7 v1(-1030.62,-1446.27)
32KHZ_1: C51.1 U12.32 Y1.2 | length 230.4
  Top Layer w8: C51.1@-639.28,-608.01 -639.28,-601.55 cw(c-556.91,-601.55) -615.16,-543.31 cw(c-605.65,-552.81) -605.65,-539.37 Y1.2@-591.18,-539.37 cw(c-591.18,-635.61) -523.12,-567.56 U12.32@-481.7,-608.98
32KHZ_2: C52.1 U12.31 Y1.1 | length 241.4
  Top Layer w8: C52.1@-629.22,-446.55 -629.22,-479.37 ccw(c-600.74,-479.37) -621.27,-499.11 -620.94,-499.45 ccw(c-591.17,-469.8) -602.92,-510.14 Y1.1@-591.17,-511.81 cw(c-591.17,-602.65) -526.94,-538.42 -485.7,-579.66 U12.31@-467.78,-595.06
+12V: C2_1.1 C2_2.1 C17.2 FB5.2 J1.1 TP9.1 U2_1.5 U2_2.5 | length 3222.4
  Top Layer w12: v2(539.71,909.79) 543.63,913.71 ccw(c342.58,1242.26) 572.52,933.24 ccw(c342.58,1242.26) 614.93,969.88 ccw(c342.58,1242.26) 615.01,969.96 ccw(c521.61,1063.23) 649.3,1096.66 cw(c660.93,1099.62) 648.93,1099.53 648.93,1103.37 648.93,1147.72 654.7,1153.49 659.54,1154.81 C2_1.1@669.29,1157.48 ; C2_1.1@673.23,1157.48 676.77,1157.48 688.81,1145.44 691,1145.44 708.71,1127.73 754.79,1127.73 768.35,1114.18 v2(773.62,1114.18)
  Top Layer w15: FB5.2@475.39,524.53 477.36,526.5 477.36,690.43 v1@479.33,692.39 ; v1(836.24,1222.63) 839.39,1225.79 839.39,1250.88 844.49,1255.97 844.49,1258.37 852.36,1266.25 ; v1(837.72,1158.46) 838.71,1157.48 C2_2.1@895.67,1157.48 ; C2_2.1@889.37,1157.48 898.01,1148.84 898.01,1147.92 919.7,1126.23 921.01,1126.23 932.09,1115.16 U2_2.5@932.09,1106.3
  Top Layer w20: J1.1@-800,1277.95 -852.36,1330.31 -852.36,1409.45 -784.32,1477.49 782.35,1477.49 850.59,1409.25 850.59,1268.02 ; v1(470.34,838.45) 470.34,835.34 476.42,829.26 v1(476.42,779.89)
  Bottom Layer w15: J1.1@-800,1277.95 J1.1@-798.82,1277.95 ; v2(773.62,1114.18) 776.78,1117.34 792.66,1117.34 v1@833.79,1158.46 ; v1(836.24,1222.63) 836.98,1221.89 836.98,1159.21 v1(837.72,1158.46)
  Bottom Layer w20: v1(470.34,838.45) 470.34,839.43 539.71,908.8 v2(539.71,909.79) ; v1(476.42,779.89) 478.48,777.83 478.48,697.7 478.35,697.57 v1(478.35,692.39)
+15V: C14.1 C24.1 L5.2 R43.1 U8.8 | length 2546.3
  Top Layer w20: C24.1@811.02,-1001.97 C24.1@821.85,-1001.97 ; C24.1@821.85,-1011.81 1017.74,-1011.81 1048.23,-1042.3 1048.23,-1323.84 950.81,-1421.26 R43.1@860.24,-1421.26
  Top Layer w25: C14.1@572.22,78.09 U8.8@572.22,156.63
  Top Layer w30: C14.1@572.99,71.02 572.99,62.56 601.18,34.37 v1(805.12,34.37) ; C24.1@820.87,-989.17 769.68,-937.99 769.68,-585.24 973.41,-381.51 973.41,33.3 v1(973.24,33.46) ; C24.1@821.85,-1001.97 L5.2@902.36,-1082.48 ; L5.2@900.39,-1092.32 L5.2@945.87,-1092.32
  Bottom Layer w30: v1@805.81,34.08 805.81,34.37 971.93,34.37 972.84,33.46 v1(973.24,33.46)
-12V: C3_1.1 C3_2.1 C34.2 FB6.2 J1.2 TP12.1 U2_1.2 U2_2.2 | length 3196.8
  Top Layer w12: v2(591.49,909.64) 638.33,965.86 ccw(c521.61,1063.23) 648.68,979.83 675.29,1020.37 C3_1.1@699.89,1023.15 ; C3_1.1@688.98,1030.51 699.12,1040.65 710.93,1040.65 719.83,1049.55 773.62,1049.55 ; U2_1.2@773.62,1011.81 773.62,1049.55 ; U2_2.2@969.49,1011.81 964.19,1017.11 964.19,1036.08 950.72,1049.55 773.62,1049.55
  Top Layer w20: J1.2@-800,1377.95 -730.12,1447.83 408.32,1447.83 450.5,1405.65 450.5,1240.94 436.5,1226.94 436.5,1216.38 v1(434.3,1214.18) ; v1(301.46,1063.09) 269.68,1031.32 269.68,973.69 281.4,961.98 366.81,961.98 446.9,881.89 474.63,881.89 504.09,852.43 504.09,847.31 515.87,835.52 v1(515.87,832.41) ; v1@514.76,832.41 514.76,781.86 v1(516.73,779.89) ; v1(517.84,692.39) 520.95,692.39 549.05,664.29 TP12.1@667.32,664.29 708.22,623.4 708.22,597.81 714.57,591.46 FB6.2@714.57,523.54
  Bottom Layer w20: v1(301.46,1063.09) 318.63,1086.89 394.45,1175.16 407.19,1190 414.26,1197.07 v1(434.3,1214.18) ; v1(515.87,832.41) 515.87,833.22 591.49,908.83 v2(591.49,909.64) ; v1(516.73,779.89) 517.29,779.34 517.29,692.95 v1(517.84,692.39)
-15V: C18.1 C19.2 C32.1 L2.4 U11.2 U11.3 U11.6 U11.7 | length 2454.5
  Top Layer w15: C19.2@348.43,-1264.76 C19.2@355.39,-1257.79
  Top Layer w25: U11.3@696.14,346.7 U11.6@696.14,157.72 696.14,127.6 718.19,105.55 ; C32.1@721.83,77.31 718.19,80.95 718.19,105.55 ; U11.2@746.14,346.7 U11.7@746.14,157.72 746.14,127.6 724.1,105.55 718.19,105.55
  Top Layer w30: C19.2@349.41,-1242.13 349.41,-951.77 934.5,-366.68 v1(934.5,73.12) ; C19.2@355.39,-1257.79 C18.1@422.24,-1257.79 459.73,-1257.79 L2.4@481.3,-1236.22 ; C32.1@721.83,77.31 721.83,74.55 722.97,73.4 814.49,73.4 v1(814.77,73.12)
  Bottom Layer w30: v1(814.77,73.12) v1(934.5,73.12)
AGND: C1.1 C2_1.2 C2_2.2 C3_1.2 C3_2.2 C17.1 C34.1 C43.2 FB4.2 J1.25 J1.26 J1.27 J1.28 J1.29 J1.30 J1.31 J1.33 R17_1.1 R17_2.1 U1.11 | length 643
  Top Layer w8: v1(-177.95,735.15) -137.72,735.15 C1.1@-136.61,734.04 ; C43.2@47.24,483.27 49.21,481.3 v1(49.21,442.91) ; U1.11@195.8,751.02 196.8,750.02 254.9,750.02 v1(255.91,749.02) ; FB4.2@304.13,461.61 305.12,462.6 v1(305.12,508.86) ; C17.1@526.57,592.44 527.56,593.43 v1(567.91,593.43) ; v1(616.14,592.44) 661.42,592.44 C34.1@662.4,591.46 ; C2_1.2@669.29,1208.66 C2_1.2@673.23,1208.66 676.77,1208.66 688.91,1220.8 700.03,1231.92 ; v1(678.68,1115.69) 678.68,1091.99 C3_1.2@688.98,1081.69 ; J1.31@689.48,1267.43 J1.31@699.77,1277.72 ; 699.77,1239.14 J1.31@699.77,1272.95 ; 700,1239.14 700,1231.96 723.3,1208.66 R17_1.1@725.39,1208.66 ; J1.31@700.72,1277.23 J1.31@700,1277.95 J1.31@699.77,1277.72 ; J1.31@705,1283.83 699.77,1278.6 J1.31@699.77,1277.72 ; v1(859.31,1125.38) 859.46,1125.38 875,1109.84 C3_2.2@875,1077.76 ; v1@895.77,1243.82 895.77,1208.76 C2_2.2@895.67,1208.66 953.74,1208.66 956.69,1211.61 v1@956.69,1244.09
  other v1: 179.13,471.46 118.11,472.44 236.22,472.44 -94.49,514.76 107.28,539.37 -206.69,551.18 413.38,590.55 774.61,600.39 -203.74,670.28 363.19,701.77 690.94,979.33 -12.8,989.17 217.52,990.16 896.75,1243.82 957.68,1244.09 972.44,1328.74
  other v2: 606.3,1184.06
ANLG_OUT_1: J1.32 R8_1.2 TP3_1.1 U2_1.1 | length 1199.7
  Top Layer w8: v1(340.63,1058.07) 335.67,1058.07 312.48,1034.87 312.48,1008.34 TP3_1.1@312.01,1007.87 335.9,983.98 394.4,983.98 430.87,947.51 483.76,903.86 526.09,861.54 526.09,861.44 544.08,843.44 552.23,843.44 R8_1.2@563.98,831.69 566.93,831.69 594.68,859.44 631.11,859.44 738.19,966.53 U2_1.1@738.19,1009.84 ; v1(473.79,1213.55) 474.64,1213.55 493.84,1232.75 541.8,1232.75 556.5,1247.45 556.5,1278.94 556.52,1279.03 556.92,1296.39 592.23,1331.7 653.75,1331.7 J1.32@700,1377.95
  Bottom Layer w8: v1(340.63,1058.07) 340.63,1077.77 423.38,1175.07 cw(c542.72,1006.31) 424.23,1175.67 cw(c542.72,1006.31) 470.86,1200.11 v1@472.08,1201.33 ; v1@472.08,1201.33 474.42,1203.68 474.42,1206.99 474.42,1207.39 v1(473.79,1213.55)
ANLG_OUT_2: J1.34 R8_2.2 TP3_2.1 U2_2.1 | length 1409.1
  Top Layer w8: v2(378.64,1079.63) 378.64,1020.97 TP3_2.1@383.86,1015.75 389.02,1015.75 405.53,999.24 405.53,995.47 429.69,971.31 437.49,963.51 438.22,963.51 490.39,919.86 528.37,881.89 614.31,881.89 v1(667.88,935.46) ; v2(515.75,1205) 519.91,1209.16 592.72,1209.16 643.5,1259.94 643.5,1282.96 681.98,1321.45 743.5,1321.45 J1.34@800,1377.95 ; v1(728.35,871.06) 728.35,848.28 740.09,836.54 R8_2.2@740.65,836.54 ; R8_2.2@740.65,831.69 752.4,843.44 758.84,843.44 763.53,848.13 763.53,877.69 878.03,992.19 921.32,992.19 932.09,1002.95 U2_2.1@932.09,1011.81
  Bottom Layer w8: v2(378.64,1079.63) 378.64,1083.05 391.62,1096.04 cw(c547.2,1037.64) 429.69,1155.15 cw(c533.37,1051.48) 456.95,1176.6 467.57,1181.45 cw(c521.61,1063.23) 488.39,1188.9 504.7,1200.31 509.39,1205 v2(515.75,1205) ; v1(667.88,935.46) 667.88,933.49 728.35,873.03 v1(728.35,871.06)
APS_EN: U10.3 U12.47 | length 2032
  Top Layer w8: v2(-520.04,-934.67) -496.45,-961.67 -496.27,-961.88 -482.98,-977.09 cw(c-580.75,-1062.76) -472.56,-1134.82 -472.56,-1137.2 -472.56,-1140.51 -468.37,-1151.71 -328.62,-1291.46 -286.96,-1326.11 -283.32,-1326.11 v1(-268.72,-1324.9) ; v1(-455.73,-894.24) -351.93,-998.03 -328.87,-998.03 -308.82,-977.99 -308.82,-941.11 -302.23,-934.52 -302.23,-932 U12.47@-286.83,-916.6 ; v1(384.23,-1554.25) 384.54,-1554.56 520.91,-1554.56 521.23,-1554.25 523.51,-1554.25 532.29,-1545.46 532.29,-1531.69 540.74,-1523.24 639.17,-1523.24 718.57,-1443.84 742.19,-1443.84 U10.3@748.03,-1437.99
  Bottom Layer w8: v2(-520.04,-934.67) -483.47,-898.11 -459.59,-898.11 v1(-455.73,-894.24) ; v1(-268.72,-1324.9) -39.38,-1554.25 v1(384.23,-1554.25)
D+: J2.3 R41.1 | length 140.9
  Top Layer w8: J2.3@0,-1433.07 0,-1376.6 ; 0,-1376.6 cw(c53.77,-1376.6) R41.1@15.75,-1338.58 ccw(c53.77,-1376.6) 0,-1376.6
D-: J2.2 R40.1 | length 231.9
  Top Layer w8: J2.2@-25.59,-1423.23 -25.59,-1381.35 ; R40.1@-43.31,-1338.58 cw(c-86.08,-1381.35) -25.59,-1381.35 ; R40.1@-43.31,-1338.58 cw(c-86.08,-1381.35) -25.59,-1381.35 ; R40.1@-43.31,-1338.58 cw(c-86.08,-1381.35) -25.59,-1381.35 ; R40.1@-43.31,-1338.58 cw(c-86.08,-1381.35) -25.59,-1381.35
DAC_OUT_1: R14_1.1 U12.63 | length 3240.4
  Top Layer w8: U12.63@34.71,-735.65 50.11,-753.56 60.15,-763.6 69.05,-766.14 109.41,-774.9 114.56,-774.9 119.4,-777.08 119.89,-777.2 128.99,-779.06 165.83,-791.02 172,-791.02 173.96,-789.07 289.74,-673.29 311.61,-673.29 468.9,-516 735.52,-516 906.75,-344.77 906.75,607.03 906.52,607.26 906.52,629.86 803.36,733.02 800.45,735.93 800.45,869.35 890.74,959.65 1046.26,959.65 1061.14,974.53 1061.14,1221.69 1010.2,1272.64 923.28,1272.64 923.21,1272.7 900.23,1272.7 900.16,1272.64 886.33,1272.64 863.99,1250.29 863.99,1211.14 847.73,1194.88 802.17,1194.88 788.39,1208.66 R14_1.1@785.43,1208.66
DAC_OUT_2: R14_2.1 U12.59 | length 3014
  Top Layer w8: U12.59@-20.97,-791.33 -62.54,-749.75 -62.54,-721.19 -46.29,-704.94 -15.96,-704.94 v2(-11.68,-700.66) ; v2(27.93,-661.79) 32.42,-657.29 304.98,-657.29 462.27,-500 728.89,-500 890.52,-338.37 890.52,-329.95 890.75,-329.72 890.75,597.44 890.52,597.67 890.52,623.23 779.53,734.22 779.53,871.06 884.65,976.19 1038.2,976.19 1045.14,983.14 1045.14,1192.23 ; R14_2.1@1006.89,1203.74 1012.73,1197.9 1036.13,1197.9 ; 1038.59,1197.62 1043.27,1192.94
  Bottom Layer w8: v2(-11.68,-700.66) -11.31,-700.66 27.56,-661.79 v2(27.93,-661.79)
ENC_A: U12.23
ENC_B: U12.25
FB: R43.2 R44.2 U10.2 | length 128.5
  Top Layer w12: U10.2@748.03,-1466.54 748.85,-1467.35 797.31,-1467.35 809.05,-1479.1 R44.2@809.05,-1481.3 R43.2@809.05,-1421.26